# EAGLE board LilyPad_Rainbow LED-Panel (EAGLE 6.1)
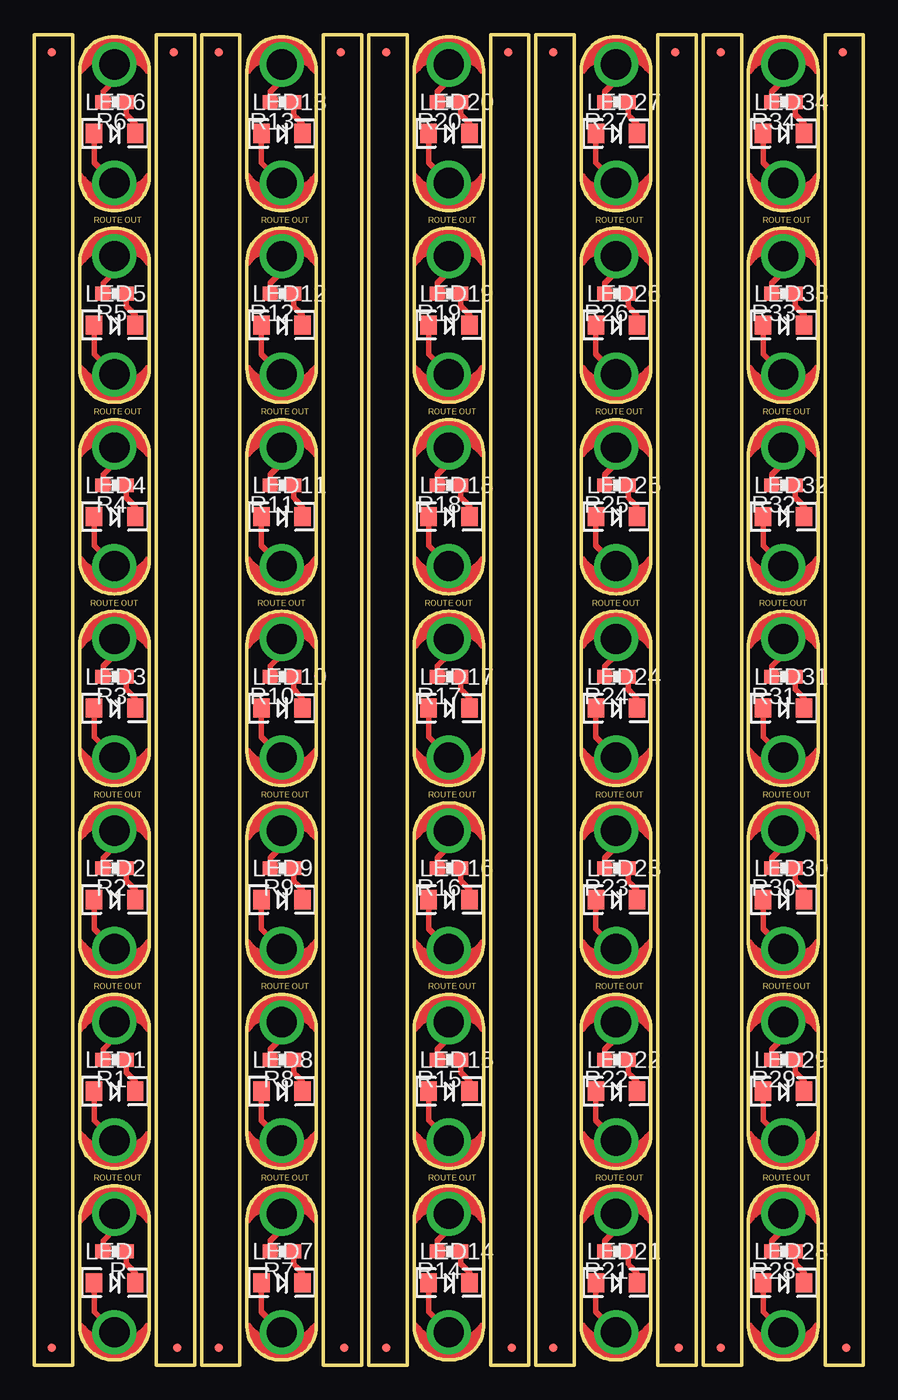
[diagram p0: board, top side]
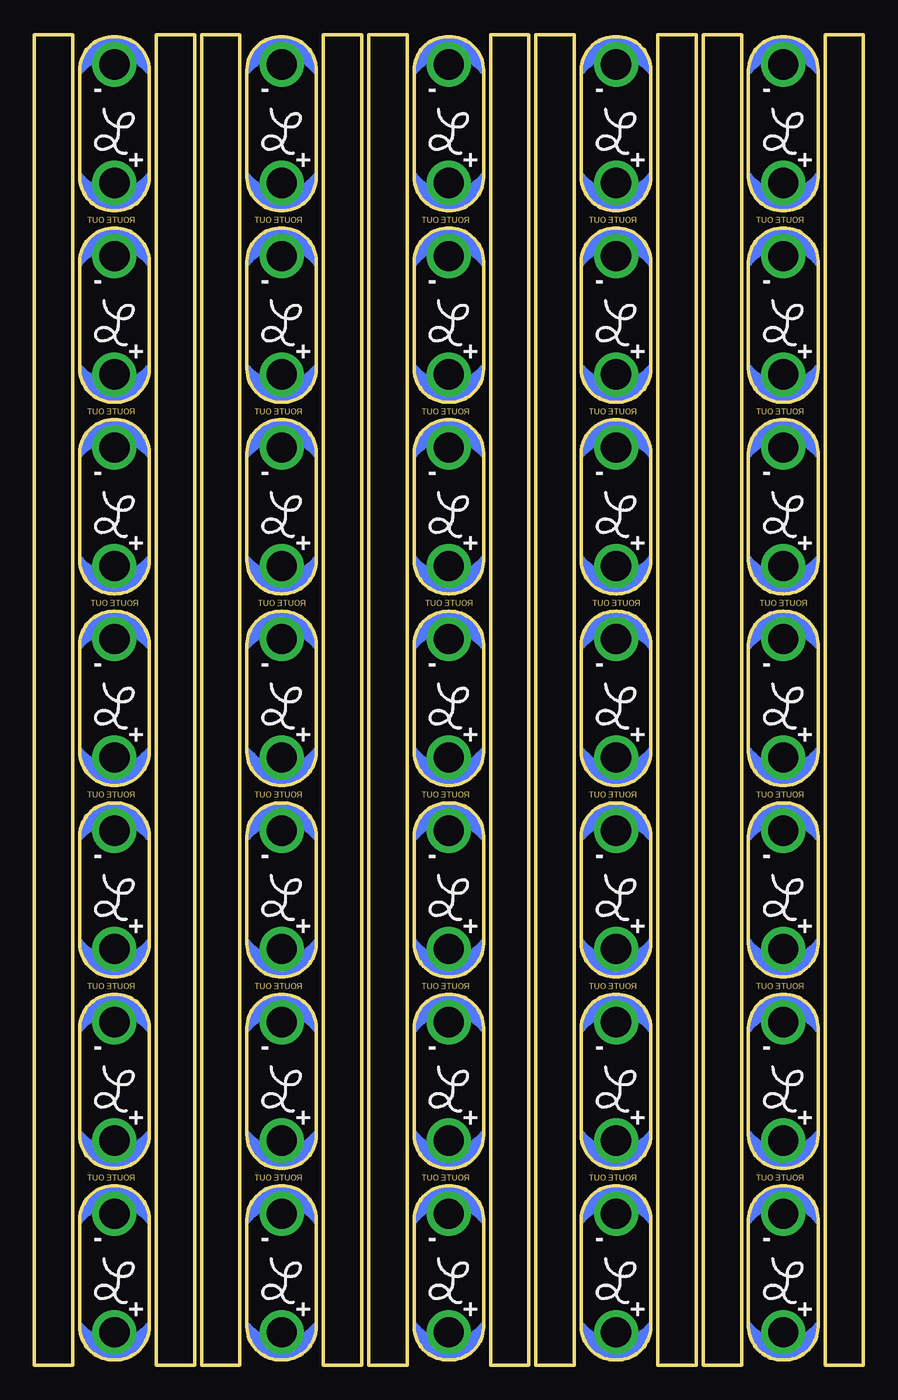
[diagram p1: board, bottom side, seen from below]

Size 60.45 x 97.03 mm. Coordinates in mm from the lower left corner, seen from the top.
Outline: 5.84,0.38 arc-90 3.3,2.79 3.3,10.67 arc-90 5.84,13.08 arc-90 8.38,10.67 8.38,2.79 arc-90 5.84,0.38
Outline: 5.84,14.35 arc-90 3.3,16.76 3.3,24.64 arc-90 5.84,27.05 arc-90 8.38,24.64 8.38,16.76 arc-90 5.84,14.35
Outline: 5.84,28.32 arc-90 3.3,30.73 3.3,38.61 arc-90 5.84,41.02 arc-90 8.38,38.61 8.38,30.73 arc-90 5.84,28.32
Outline: 5.84,42.29 arc-90 3.3,44.7 3.3,52.58 arc-90 5.84,54.99 arc-90 8.38,52.58 8.38,44.7 arc-90 5.84,42.29
Outline: 5.84,56.26 arc-90 3.3,58.67 3.3,66.55 arc-90 5.84,68.96 arc-90 8.38,66.55 8.38,58.67 arc-90 5.84,56.26
Outline: 5.84,70.23 arc-90 3.3,72.64 3.3,80.52 arc-90 5.84,82.93 arc-90 8.38,80.52 8.38,72.64 arc-90 5.84,70.23
Outline: 5.84,84.2 arc-90 3.3,86.61 3.3,94.49 arc-90 5.84,96.9 arc-90 8.38,94.49 8.38,86.61 arc-90 5.84,84.2
Outline: 2.79,97.03 2.79,0 0,0 0,97.03 2.79,97.03
Outline: 11.68,97.03 11.68,0 8.89,0 8.89,97.03 11.68,97.03
Outline: 18.03,0.38 arc-90 15.49,2.79 15.49,10.67 arc-90 18.03,13.08 arc-90 20.57,10.67 20.57,2.79 arc-90 18.03,0.38
Outline: 18.03,14.35 arc-90 15.49,16.76 15.49,24.64 arc-90 18.03,27.05 arc-90 20.57,24.64 20.57,16.76 arc-90 18.03,14.35
Outline: 18.03,28.32 arc-90 15.49,30.73 15.49,38.61 arc-90 18.03,41.02 arc-90 20.57,38.61 20.57,30.73 arc-90 18.03,28.32
Outline: 18.03,42.29 arc-90 15.49,44.7 15.49,52.58 arc-90 18.03,54.99 arc-90 20.57,52.58 20.57,44.7 arc-90 18.03,42.29
Outline: 18.03,56.26 arc-90 15.49,58.67 15.49,66.55 arc-90 18.03,68.96 arc-90 20.57,66.55 20.57,58.67 arc-90 18.03,56.26
Outline: 18.03,70.23 arc-90 15.49,72.64 15.49,80.52 arc-90 18.03,82.93 arc-90 20.57,80.52 20.57,72.64 arc-90 18.03,70.23
Outline: 18.03,84.2 arc-90 15.49,86.61 15.49,94.49 arc-90 18.03,96.9 arc-90 20.57,94.49 20.57,86.61 arc-90 18.03,84.2
Outline: 14.99,97.03 14.99,0 12.19,0 12.19,97.03 14.99,97.03
Outline: 23.88,97.03 23.88,0 21.08,0 21.08,97.03 23.88,97.03
Outline: 30.23,0.38 arc-90 27.69,2.79 27.69,10.67 arc-90 30.23,13.08 arc-90 32.77,10.67 32.77,2.79 arc-90 30.23,0.38
Outline: 30.23,14.35 arc-90 27.69,16.76 27.69,24.64 arc-90 30.23,27.05 arc-90 32.77,24.64 32.77,16.76 arc-90 30.23,14.35
Outline: 30.23,28.32 arc-90 27.69,30.73 27.69,38.61 arc-90 30.23,41.02 arc-90 32.77,38.61 32.77,30.73 arc-90 30.23,28.32
Outline: 30.23,42.29 arc-90 27.69,44.7 27.69,52.58 arc-90 30.23,54.99 arc-90 32.77,52.58 32.77,44.7 arc-90 30.23,42.29
Outline: 30.23,56.26 arc-90 27.69,58.67 27.69,66.55 arc-90 30.23,68.96 arc-90 32.77,66.55 32.77,58.67 arc-90 30.23,56.26
Outline: 30.23,70.23 arc-90 27.69,72.64 27.69,80.52 arc-90 30.23,82.93 arc-90 32.77,80.52 32.77,72.64 arc-90 30.23,70.23
Outline: 30.23,84.2 arc-90 27.69,86.61 27.69,94.49 arc-90 30.23,96.9 arc-90 32.77,94.49 32.77,86.61 arc-90 30.23,84.2
Outline: 27.18,97.03 27.18,0 24.38,0 24.38,97.03 27.18,97.03
Outline: 36.07,97.03 36.07,0 33.27,0 33.27,97.03 36.07,97.03
Outline: 42.42,0.38 arc-90 39.88,2.79 39.88,10.67 arc-90 42.42,13.08 arc-90 44.96,10.67 44.96,2.79 arc-90 42.42,0.38
Outline: 42.42,14.35 arc-90 39.88,16.76 39.88,24.64 arc-90 42.42,27.05 arc-90 44.96,24.64 44.96,16.76 arc-90 42.42,14.35
Outline: 42.42,28.32 arc-90 39.88,30.73 39.88,38.61 arc-90 42.42,41.02 arc-90 44.96,38.61 44.96,30.73 arc-90 42.42,28.32
Outline: 42.42,42.29 arc-90 39.88,44.7 39.88,52.58 arc-90 42.42,54.99 arc-90 44.96,52.58 44.96,44.7 arc-90 42.42,42.29
Outline: 42.42,56.26 arc-90 39.88,58.67 39.88,66.55 arc-90 42.42,68.96 arc-90 44.96,66.55 44.96,58.67 arc-90 42.42,56.26
Outline: 42.42,70.23 arc-90 39.88,72.64 39.88,80.52 arc-90 42.42,82.93 arc-90 44.96,80.52 44.96,72.64 arc-90 42.42,70.23
Outline: 42.42,84.2 arc-90 39.88,86.61 39.88,94.49 arc-90 42.42,96.9 arc-90 44.96,94.49 44.96,86.61 arc-90 42.42,84.2
Outline: 39.37,97.03 39.37,0 36.58,0 36.58,97.03 39.37,97.03
Outline: 48.26,97.03 48.26,0 45.47,0 45.47,97.03 48.26,97.03
Outline: 54.61,0.38 arc-90 52.07,2.79 52.07,10.67 arc-90 54.61,13.08 arc-90 57.15,10.67 57.15,2.79 arc-90 54.61,0.38
Outline: 54.61,14.35 arc-90 52.07,16.76 52.07,24.64 arc-90 54.61,27.05 arc-90 57.15,24.64 57.15,16.76 arc-90 54.61,14.35
Outline: 54.61,28.32 arc-90 52.07,30.73 52.07,38.61 arc-90 54.61,41.02 arc-90 57.15,38.61 57.15,30.73 arc-90 54.61,28.32
Outline: 54.61,42.29 arc-90 52.07,44.7 52.07,52.58 arc-90 54.61,54.99 arc-90 57.15,52.58 57.15,44.7 arc-90 54.61,42.29
Outline: 54.61,56.26 arc-90 52.07,58.67 52.07,66.55 arc-90 54.61,68.96 arc-90 57.15,66.55 57.15,58.67 arc-90 54.61,56.26
Outline: 54.61,70.23 arc-90 52.07,72.64 52.07,80.52 arc-90 54.61,82.93 arc-90 57.15,80.52 57.15,72.64 arc-90 54.61,70.23
Outline: 54.61,84.2 arc-90 52.07,86.61 52.07,94.49 arc-90 54.61,96.9 arc-90 57.15,94.49 57.15,86.61 arc-90 54.61,84.2
Outline: 51.56,97.03 51.56,0 48.77,0 48.77,97.03 51.56,97.03
Outline: 60.45,97.03 60.45,0 57.66,0 57.66,97.03 60.45,97.03
Copper layers (1*16): Top 0.035mm / dielectric 1.5mm / Bottom 0.035mm
Design rules: minimum track width 8mil, minimum drill 20mil, track to track 8mil, track to pad 8mil, pad to pad 8mil, via to via 8mil, smd to smd 8mil, copper to edge 8mil, drill to drill 8mil, minimum pad ring 12mil, minimum via ring 10mil, stop-mask expansion 4mil, vias tented up to drill 20mil, thermal gap 10mil

## Footprints (pad centres in the part's own frame; a part is rotated, then mirrored left to right if it is on the bottom)
MICRO-FIDUCIAL = smd 0.635 x 0.635: 1 0,0
LED-1206 = smd 1.2 x 1.4: A -1.5,0; C 1.5,0
PETAL-SMALL = drill 2.2: 1 0,0
0603-RES = smd 1.1 x 1: 1 -0.85,0; 2 0.85,0

## Placement (x,y rotation side)
E$1  [MICRO-FIDUCIAL]  1.27,95.76 0 top
E$2  [MICRO-FIDUCIAL]  10.16,95.76 0 top
E$3  [MICRO-FIDUCIAL]  1.27,1.27 0 top
E$4  [MICRO-FIDUCIAL]  10.41,1.27 0 top
E$5  [MICRO-FIDUCIAL]  13.46,95.76 0 top
E$6  [MICRO-FIDUCIAL]  22.35,95.76 0 top
E$7  [MICRO-FIDUCIAL]  13.46,1.27 0 top
E$8  [MICRO-FIDUCIAL]  22.61,1.27 0 top
E$9  [MICRO-FIDUCIAL]  25.65,95.76 0 top
E$10  [MICRO-FIDUCIAL]  34.54,95.76 0 top
E$11  [MICRO-FIDUCIAL]  25.65,1.27 0 top
E$12  [MICRO-FIDUCIAL]  34.8,1.27 0 top
E$13  [MICRO-FIDUCIAL]  37.85,95.76 0 top
E$14  [MICRO-FIDUCIAL]  46.74,95.76 0 top
E$15  [MICRO-FIDUCIAL]  37.85,1.27 0 top
E$16  [MICRO-FIDUCIAL]  46.99,1.27 0 top
E$17  [MICRO-FIDUCIAL]  50.04,95.76 0 top
E$18  [MICRO-FIDUCIAL]  58.93,95.76 0 top
E$19  [MICRO-FIDUCIAL]  50.04,1.27 0 top
E$20  [MICRO-FIDUCIAL]  59.18,1.27 0 top
LED  White  [LED-1206]  5.86,6.02 0 top
LED1  White  [LED-1206]  5.86,19.99 0 top
LED2  White  [LED-1206]  5.86,33.96 0 top
LED3  White  [LED-1206]  5.86,47.93 0 top
LED4  White  [LED-1206]  5.86,61.9 0 top
LED5  White  [LED-1206]  5.86,75.87 0 top
LED6  White  [LED-1206]  5.86,89.84 0 top
LED7  White  [LED-1206]  18.05,6.02 0 top
LED8  White  [LED-1206]  18.05,19.99 0 top
LED9  White  [LED-1206]  18.05,33.96 0 top
LED10  White  [LED-1206]  18.05,47.93 0 top
LED11  White  [LED-1206]  18.05,61.9 0 top
LED12  White  [LED-1206]  18.05,75.87 0 top
LED13  White  [LED-1206]  18.05,89.84 0 top
LED14  White  [LED-1206]  30.25,6.02 0 top
LED15  White  [LED-1206]  30.25,19.99 0 top
LED16  White  [LED-1206]  30.25,33.96 0 top
LED17  White  [LED-1206]  30.25,47.93 0 top
LED18  White  [LED-1206]  30.25,61.9 0 top
LED19  White  [LED-1206]  30.25,75.87 0 top
LED20  White  [LED-1206]  30.25,89.84 0 top
LED21  White  [LED-1206]  42.44,6.02 0 top
LED22  White  [LED-1206]  42.44,19.99 0 top
LED23  White  [LED-1206]  42.44,33.96 0 top
LED24  White  [LED-1206]  42.44,47.93 0 top
LED25  White  [LED-1206]  42.44,61.9 0 top
LED26  White  [LED-1206]  42.44,75.87 0 top
LED27  White  [LED-1206]  42.44,89.84 0 top
LED28  White  [LED-1206]  54.63,6.02 0 top
LED29  White  [LED-1206]  54.63,19.99 0 top
LED30  White  [LED-1206]  54.63,33.96 0 top
LED31  White  [LED-1206]  54.63,47.93 0 top
LED32  White  [LED-1206]  54.63,61.9 0 top
LED33  White  [LED-1206]  54.63,75.87 0 top
LED34  White  [LED-1206]  54.63,89.84 0 top
LED+  SEWTAP6  [PETAL-SMALL]  5.84,2.41 0 top
LED+1  SEWTAP6  [PETAL-SMALL]  5.84,16.38 0 top
LED+2  SEWTAP6  [PETAL-SMALL]  5.84,30.35 0 top
LED+3  SEWTAP6  [PETAL-SMALL]  5.84,44.32 0 top
LED+4  SEWTAP6  [PETAL-SMALL]  5.84,58.29 0 top
LED+5  SEWTAP6  [PETAL-SMALL]  5.84,72.26 0 top
LED+6  SEWTAP6  [PETAL-SMALL]  5.84,86.23 0 top
LED+7  SEWTAP6  [PETAL-SMALL]  18.03,2.41 0 top
LED+8  SEWTAP6  [PETAL-SMALL]  18.03,16.38 0 top
LED+9  SEWTAP6  [PETAL-SMALL]  18.03,30.35 0 top
LED+10  SEWTAP6  [PETAL-SMALL]  18.03,44.32 0 top
LED+11  SEWTAP6  [PETAL-SMALL]  18.03,58.29 0 top
LED+12  SEWTAP6  [PETAL-SMALL]  18.03,72.26 0 top
LED+13  SEWTAP6  [PETAL-SMALL]  18.03,86.23 0 top
LED+14  SEWTAP6  [PETAL-SMALL]  30.23,2.41 0 top
LED+15  SEWTAP6  [PETAL-SMALL]  30.23,16.38 0 top
LED+16  SEWTAP6  [PETAL-SMALL]  30.23,30.35 0 top
LED+17  SEWTAP6  [PETAL-SMALL]  30.23,44.32 0 top
LED+18  SEWTAP6  [PETAL-SMALL]  30.23,58.29 0 top
LED+19  SEWTAP6  [PETAL-SMALL]  30.23,72.26 0 top
LED+20  SEWTAP6  [PETAL-SMALL]  30.23,86.23 0 top
LED+21  SEWTAP6  [PETAL-SMALL]  42.42,2.41 0 top
LED+22  SEWTAP6  [PETAL-SMALL]  42.42,16.38 0 top
LED+23  SEWTAP6  [PETAL-SMALL]  42.42,30.35 0 top
LED+24  SEWTAP6  [PETAL-SMALL]  42.42,44.32 0 top
LED+25  SEWTAP6  [PETAL-SMALL]  42.42,58.29 0 top
LED+26  SEWTAP6  [PETAL-SMALL]  42.42,72.26 0 top
LED+27  SEWTAP6  [PETAL-SMALL]  42.42,86.23 0 top
LED+28  SEWTAP6  [PETAL-SMALL]  54.61,2.41 0 top
LED+29  SEWTAP6  [PETAL-SMALL]  54.61,16.38 0 top
LED+30  SEWTAP6  [PETAL-SMALL]  54.61,30.35 0 top
LED+31  SEWTAP6  [PETAL-SMALL]  54.61,44.32 0 top
LED+32  SEWTAP6  [PETAL-SMALL]  54.61,58.29 0 top
LED+33  SEWTAP6  [PETAL-SMALL]  54.61,72.26 0 top
LED+34  SEWTAP6  [PETAL-SMALL]  54.61,86.23 0 top
LED-  SEWTAP6  [PETAL-SMALL]  5.84,11.05 180 top
LED-1  SEWTAP6  [PETAL-SMALL]  5.84,25.02 180 top
LED-2  SEWTAP6  [PETAL-SMALL]  5.84,38.99 180 top
LED-3  SEWTAP6  [PETAL-SMALL]  5.84,52.96 180 top
LED-4  SEWTAP6  [PETAL-SMALL]  5.84,66.93 180 top
LED-5  SEWTAP6  [PETAL-SMALL]  5.84,80.9 180 top
LED-6  SEWTAP6  [PETAL-SMALL]  5.84,94.87 180 top
LED-7  SEWTAP6  [PETAL-SMALL]  18.03,11.05 180 top
LED-8  SEWTAP6  [PETAL-SMALL]  18.03,25.02 180 top
LED-9  SEWTAP6  [PETAL-SMALL]  18.03,38.99 180 top
LED-10  SEWTAP6  [PETAL-SMALL]  18.03,52.96 180 top
LED-11  SEWTAP6  [PETAL-SMALL]  18.03,66.93 180 top
LED-12  SEWTAP6  [PETAL-SMALL]  18.03,80.9 180 top
LED-13  SEWTAP6  [PETAL-SMALL]  18.03,94.87 180 top
LED-14  SEWTAP6  [PETAL-SMALL]  30.23,11.05 180 top
LED-15  SEWTAP6  [PETAL-SMALL]  30.23,25.02 180 top
LED-16  SEWTAP6  [PETAL-SMALL]  30.23,38.99 180 top
LED-17  SEWTAP6  [PETAL-SMALL]  30.23,52.96 180 top
LED-18  SEWTAP6  [PETAL-SMALL]  30.23,66.93 180 top
LED-19  SEWTAP6  [PETAL-SMALL]  30.23,80.9 180 top
LED-20  SEWTAP6  [PETAL-SMALL]  30.23,94.87 180 top
LED-21  SEWTAP6  [PETAL-SMALL]  42.42,11.05 180 top
LED-22  SEWTAP6  [PETAL-SMALL]  42.42,25.02 180 top
LED-23  SEWTAP6  [PETAL-SMALL]  42.42,38.99 180 top
LED-24  SEWTAP6  [PETAL-SMALL]  42.42,52.96 180 top
LED-25  SEWTAP6  [PETAL-SMALL]  42.42,66.93 180 top
LED-26  SEWTAP6  [PETAL-SMALL]  42.42,80.9 180 top
LED-27  SEWTAP6  [PETAL-SMALL]  42.42,94.87 180 top
LED-28  SEWTAP6  [PETAL-SMALL]  54.61,11.05 180 top
LED-29  SEWTAP6  [PETAL-SMALL]  54.61,25.02 180 top
LED-30  SEWTAP6  [PETAL-SMALL]  54.61,38.99 180 top
LED-31  SEWTAP6  [PETAL-SMALL]  54.61,52.96 180 top
LED-32  SEWTAP6  [PETAL-SMALL]  54.61,66.93 180 top
LED-33  SEWTAP6  [PETAL-SMALL]  54.61,80.9 180 top
LED-34  SEWTAP6  [PETAL-SMALL]  54.61,94.87 180 top
LOGO1  LOGO-LPL  [LOGO-L]  5.84,6.17 0 bottom
LOGO2  LOGO-LPL  [LOGO-L]  5.84,20.14 0 bottom
LOGO3  LOGO-LPL  [LOGO-L]  5.84,34.11 0 bottom
LOGO4  LOGO-LPL  [LOGO-L]  5.84,48.08 0 bottom
LOGO5  LOGO-LPL  [LOGO-L]  5.84,62.05 0 bottom
LOGO6  LOGO-LPL  [LOGO-L]  5.84,76.02 0 bottom
LOGO7  LOGO-LPL  [LOGO-L]  5.84,89.99 0 bottom
LOGO8  LOGO-LPL  [LOGO-L]  18.03,6.17 0 bottom
LOGO9  LOGO-LPL  [LOGO-L]  18.03,20.14 0 bottom
LOGO10  LOGO-LPL  [LOGO-L]  18.03,34.11 0 bottom
LOGO11  LOGO-LPL  [LOGO-L]  18.03,48.08 0 bottom
LOGO12  LOGO-LPL  [LOGO-L]  18.03,62.05 0 bottom
LOGO13  LOGO-LPL  [LOGO-L]  18.03,76.02 0 bottom
LOGO14  LOGO-LPL  [LOGO-L]  18.03,89.99 0 bottom
LOGO15  LOGO-LPL  [LOGO-L]  30.23,6.17 0 bottom
LOGO16  LOGO-LPL  [LOGO-L]  30.23,20.14 0 bottom
LOGO17  LOGO-LPL  [LOGO-L]  30.23,34.11 0 bottom
LOGO18  LOGO-LPL  [LOGO-L]  30.23,48.08 0 bottom
LOGO19  LOGO-LPL  [LOGO-L]  30.23,62.05 0 bottom
LOGO20  LOGO-LPL  [LOGO-L]  30.23,76.02 0 bottom
LOGO21  LOGO-LPL  [LOGO-L]  30.23,89.99 0 bottom
LOGO22  LOGO-LPL  [LOGO-L]  42.42,6.17 0 bottom
LOGO23  LOGO-LPL  [LOGO-L]  42.42,20.14 0 bottom
LOGO24  LOGO-LPL  [LOGO-L]  42.42,34.11 0 bottom
LOGO25  LOGO-LPL  [LOGO-L]  42.42,48.08 0 bottom
LOGO26  LOGO-LPL  [LOGO-L]  42.42,62.05 0 bottom
LOGO27  LOGO-LPL  [LOGO-L]  42.42,76.02 0 bottom
LOGO28  LOGO-LPL  [LOGO-L]  42.42,89.99 0 bottom
LOGO29  LOGO-LPL  [LOGO-L]  54.61,6.17 0 bottom
LOGO30  LOGO-LPL  [LOGO-L]  54.61,20.14 0 bottom
LOGO31  LOGO-LPL  [LOGO-L]  54.61,34.11 0 bottom
LOGO32  LOGO-LPL  [LOGO-L]  54.61,48.08 0 bottom
LOGO33  LOGO-LPL  [LOGO-L]  54.61,62.05 0 bottom
LOGO34  LOGO-LPL  [LOGO-L]  54.61,76.02 0 bottom
LOGO35  LOGO-LPL  [LOGO-L]  54.61,89.99 0 bottom
R  100  [0603-RES]  5.86,8.3 180 top
R1  100  [0603-RES]  5.86,22.27 180 top
R2  100  [0603-RES]  5.86,36.25 180 top
R3  100  [0603-RES]  5.86,50.22 180 top
R4  100  [0603-RES]  5.86,64.19 180 top
R5  100  [0603-RES]  5.86,78.16 180 top
R6  100  [0603-RES]  5.86,92.12 180 top
R7  100  [0603-RES]  18.05,8.3 180 top
R8  100  [0603-RES]  18.05,22.27 180 top
R9  100  [0603-RES]  18.05,36.25 180 top
R10  100  [0603-RES]  18.05,50.22 180 top
R11  100  [0603-RES]  18.05,64.19 180 top
R12  100  [0603-RES]  18.05,78.16 180 top
R13  100  [0603-RES]  18.05,92.12 180 top
R14  100  [0603-RES]  30.25,8.3 180 top
R15  100  [0603-RES]  30.25,22.27 180 top
R16  100  [0603-RES]  30.25,36.25 180 top
R17  100  [0603-RES]  30.25,50.22 180 top
R18  100  [0603-RES]  30.25,64.19 180 top
R19  100  [0603-RES]  30.25,78.16 180 top
R20  100  [0603-RES]  30.25,92.12 180 top
R21  100  [0603-RES]  42.44,8.3 180 top
R22  100  [0603-RES]  42.44,22.27 180 top
R23  100  [0603-RES]  42.44,36.25 180 top
R24  100  [0603-RES]  42.44,50.22 180 top
R25  100  [0603-RES]  42.44,64.19 180 top
R26  100  [0603-RES]  42.44,78.16 180 top
R27  100  [0603-RES]  42.44,92.12 180 top
R28  100  [0603-RES]  54.63,8.3 180 top
R29  100  [0603-RES]  54.63,22.27 180 top
R30  100  [0603-RES]  54.63,36.25 180 top
R31  100  [0603-RES]  54.63,50.22 180 top
R32  100  [0603-RES]  54.63,64.19 180 top
R33  100  [0603-RES]  54.63,78.16 180 top
R34  100  [0603-RES]  54.63,92.12 180 top

## Library data of the parts
E$1-E$20 = SparkFun-Aesthetics
LED LED1-LED34 = SparkFun-3-2-07
LED+ LED+1-LED+34 LED- LED-1-LED-34 LOGO1-LOGO35 = LilyPad-Wearables
R R1-R34 = SparkFun

## Nets
+: LED+.1 LED.A
+1: LED1.A LED+1.1
+2: LED2.A LED+2.1
+3: LED3.A LED+3.1
+4: LED4.A LED+4.1
+5: LED5.A LED+5.1
+6: LED6.A LED+6.1
+7: LED7.A LED+7.1
+8: LED8.A LED+8.1
+9: LED9.A LED+9.1
+10: LED10.A LED+10.1
+11: LED11.A LED+11.1
+12: LED12.A LED+12.1
+13: LED13.A LED+13.1
+14: LED14.A LED+14.1
+15: LED15.A LED+15.1
+16: LED16.A LED+16.1
+17: LED17.A LED+17.1
+18: LED18.A LED+18.1
+19: LED19.A LED+19.1
+20: LED20.A LED+20.1
+21: LED21.A LED+21.1
+22: LED22.A LED+22.1
+23: LED23.A LED+23.1
+24: LED24.A LED+24.1
+25: LED25.A LED+25.1
+26: LED26.A LED+26.1
+27: LED27.A LED+27.1
+28: LED28.A LED+28.1
+29: LED29.A LED+29.1
+30: LED30.A LED+30.1
+31: LED31.A LED+31.1
+32: LED32.A LED+32.1
+33: LED33.A LED+33.1
+34: LED34.A LED+34.1
-: LED-.1 R.2
-1: LED-1.1 R1.2
-2: LED-2.1 R2.2
-3: LED-3.1 R3.2
-4: LED-4.1 R4.2
-5: LED-5.1 R5.2
-6: LED-6.1 R6.2
-7: LED-7.1 R7.2
-8: LED-8.1 R8.2
-9: LED-9.1 R9.2
-10: LED-10.1 R10.2
-11: LED-11.1 R11.2
-12: LED-12.1 R12.2
-13: LED-13.1 R13.2
-14: LED-14.1 R14.2
-15: LED-15.1 R15.2
-16: LED-16.1 R16.2
-17: LED-17.1 R17.2
-18: LED-18.1 R18.2
-19: LED-19.1 R19.2
-20: LED-20.1 R20.2
-21: LED-21.1 R21.2
-22: LED-22.1 R22.2
-23: LED-23.1 R23.2
-24: LED-24.1 R24.2
-25: LED-25.1 R25.2
-26: LED-26.1 R26.2
-27: LED-27.1 R27.2
-28: LED-28.1 R28.2
-29: LED-29.1 R29.2
-30: LED-30.1 R30.2
-31: LED-31.1 R31.2
-32: LED-32.1 R32.2
-33: LED-33.1 R33.2
-34: LED-34.1 R34.2
N$1: LED.C R.1
N$2: LED1.C R1.1
N$3: LED2.C R2.1
N$4: LED3.C R3.1
N$5: LED4.C R4.1
N$6: LED5.C R5.1
N$7: LED6.C R6.1
N$8: LED7.C R7.1
N$9: LED8.C R8.1
N$10: LED9.C R9.1
N$11: LED10.C R10.1
N$12: LED11.C R11.1
N$13: LED12.C R12.1
N$14: LED13.C R13.1
N$15: LED14.C R14.1
N$16: LED15.C R15.1
N$17: LED16.C R16.1
N$18: LED17.C R17.1
N$19: LED18.C R18.1
N$20: LED19.C R19.1
N$21: LED20.C R20.1
N$22: LED21.C R21.1
N$23: LED22.C R22.1
N$24: LED23.C R23.1
N$25: LED24.C R24.1
N$26: LED25.C R25.1
N$27: LED26.C R26.1
N$28: LED27.C R27.1
N$29: LED28.C R28.1
N$30: LED29.C R29.1
N$31: LED30.C R30.1
N$32: LED31.C R31.1
N$33: LED32.C R32.1
N$34: LED33.C R33.1
N$35: LED34.C R34.1

## Tracks (layer width: path | path; a pad name or v marks a point on that pad's centre or on a via)
+
  Top 0.406: 5.84,2.29 LED+.1 4.36,3.89 LED.A
+1
  Top 0.406: 5.84,16.26 LED+1.1 4.36,17.86 LED1.A
+2
  Top 0.406: 5.84,30.23 LED+2.1 4.36,31.83 LED2.A
+3
  Top 0.406: 5.84,44.2 LED+3.1 4.36,45.8 LED3.A
+4
  Top 0.406: 5.84,58.17 LED+4.1 4.36,59.77 LED4.A
+5
  Top 0.406: 5.84,72.14 LED+5.1 4.36,73.74 LED5.A
+6
  Top 0.406: 5.84,86.11 LED+6.1 4.36,87.71 LED6.A
+7
  Top 0.406: 18.03,2.29 LED+7.1 16.55,3.89 LED7.A
+8
  Top 0.406: 18.03,16.26 LED+8.1 16.55,17.86 LED8.A
+9
  Top 0.406: 18.03,30.23 LED+9.1 16.55,31.83 LED9.A
+10
  Top 0.406: 18.03,44.2 LED+10.1 16.55,45.8 LED10.A
+11
  Top 0.406: 18.03,58.17 LED+11.1 16.55,59.77 LED11.A
+12
  Top 0.406: 18.03,72.14 LED+12.1 16.55,73.74 LED12.A
+13
  Top 0.406: 18.03,86.11 LED+13.1 16.55,87.71 LED13.A
+14
  Top 0.406: 30.23,2.29 LED+14.1 28.75,3.89 LED14.A
+15
  Top 0.406: 30.23,16.26 LED+15.1 28.75,17.86 LED15.A
+16
  Top 0.406: 30.23,30.23 LED+16.1 28.75,31.83 LED16.A
+17
  Top 0.406: 30.23,44.2 LED+17.1 28.75,45.8 LED17.A
+18
  Top 0.406: 30.23,58.17 LED+18.1 28.75,59.77 LED18.A
+19
  Top 0.406: 30.23,72.14 LED+19.1 28.75,73.74 LED19.A
+20
  Top 0.406: 30.23,86.11 LED+20.1 28.75,87.71 LED20.A
+21
  Top 0.406: 42.42,2.29 LED+21.1 40.94,3.89 LED21.A
+22
  Top 0.406: 42.42,16.26 LED+22.1 40.94,17.86 LED22.A
+23
  Top 0.406: 42.42,30.23 LED+23.1 40.94,31.83 LED23.A
+24
  Top 0.406: 42.42,44.2 LED+24.1 40.94,45.8 LED24.A
+25
  Top 0.406: 42.42,58.17 LED+25.1 40.94,59.77 LED25.A
+26
  Top 0.406: 42.42,72.14 LED+26.1 40.94,73.74 LED26.A
+27
  Top 0.406: 42.42,86.11 LED+27.1 40.94,87.71 LED27.A
+28
  Top 0.406: 54.61,2.29 LED+28.1 53.13,3.89 LED28.A
+29
  Top 0.406: 54.61,16.26 LED+29.1 53.13,17.86 LED29.A
+30
  Top 0.406: 54.61,30.23 LED+30.1 53.13,31.83 LED30.A
+31
  Top 0.406: 54.61,44.2 LED+31.1 53.13,45.8 LED31.A
+32
  Top 0.406: 54.61,58.17 LED+32.1 53.13,59.77 LED32.A
+33
  Top 0.406: 54.61,72.14 LED+33.1 53.13,73.74 LED33.A
+34
  Top 0.406: 54.61,86.11 LED+34.1 53.13,87.71 LED34.A
-
  Top 0.406: LED-.1 5.84,9.91 5.01,9.08 R.2
-1
  Top 0.406: LED-1.1 5.84,23.88 5.01,23.05 R1.2
-2
  Top 0.406: LED-2.1 5.84,37.85 5.01,37.02 R2.2
-3
  Top 0.406: LED-3.1 5.84,51.82 5.01,50.99 R3.2
-4
  Top 0.406: LED-4.1 5.84,65.79 5.01,64.96 R4.2
-5
  Top 0.406: LED-5.1 5.84,79.76 5.01,78.93 R5.2
-6
  Top 0.406: LED-6.1 5.84,93.73 5.01,92.9 R6.2
-7
  Top 0.406: LED-7.1 18.03,9.91 17.2,9.08 R7.2
-8
  Top 0.406: LED-8.1 18.03,23.88 17.2,23.05 R8.2
-9
  Top 0.406: LED-9.1 18.03,37.85 17.2,37.02 R9.2
-10
  Top 0.406: LED-10.1 18.03,51.82 17.2,50.99 R10.2
-11
  Top 0.406: LED-11.1 18.03,65.79 17.2,64.96 R11.2
-12
  Top 0.406: LED-12.1 18.03,79.76 17.2,78.93 R12.2
-13
  Top 0.406: LED-13.1 18.03,93.73 17.2,92.9 R13.2
-14
  Top 0.406: LED-14.1 30.23,9.91 29.4,9.08 R14.2
-15
  Top 0.406: LED-15.1 30.23,23.88 29.4,23.05 R15.2
-16
  Top 0.406: LED-16.1 30.23,37.85 29.4,37.02 R16.2
-17
  Top 0.406: LED-17.1 30.23,51.82 29.4,50.99 R17.2
-18
  Top 0.406: LED-18.1 30.23,65.79 29.4,64.96 R18.2
-19
  Top 0.406: LED-19.1 30.23,79.76 29.4,78.93 R19.2
-20
  Top 0.406: LED-20.1 30.23,93.73 29.4,92.9 R20.2
-21
  Top 0.406: LED-21.1 42.42,9.91 41.59,9.08 R21.2
-22
  Top 0.406: LED-22.1 42.42,23.88 41.59,23.05 R22.2
-23
  Top 0.406: LED-23.1 42.42,37.85 41.59,37.02 R23.2
-24
  Top 0.406: LED-24.1 42.42,51.82 41.59,50.99 R24.2
-25
  Top 0.406: LED-25.1 42.42,65.79 41.59,64.96 R25.2
-26
  Top 0.406: LED-26.1 42.42,79.76 41.59,78.93 R26.2
-27
  Top 0.406: LED-27.1 42.42,93.73 41.59,92.9 R27.2
-28
  Top 0.406: LED-28.1 54.61,9.91 53.78,9.08 R28.2
-29
  Top 0.406: LED-29.1 54.61,23.88 53.78,23.05 R29.2
-30
  Top 0.406: LED-30.1 54.61,37.85 53.78,37.02 R30.2
-31
  Top 0.406: LED-31.1 54.61,51.82 53.78,50.99 R31.2
-32
  Top 0.406: LED-32.1 54.61,65.79 53.78,64.96 R32.2
-33
  Top 0.406: LED-33.1 54.61,79.76 53.78,78.93 R33.2
-34
  Top 0.406: LED-34.1 54.61,93.73 53.78,92.9 R34.2
N$1
  Top 0.254: 6.92,7.17 6.86,7.24
  Top 0.406: LED.C 7.36,6.74 6.92,7.17 6.71,7.38 R.1
N$2
  Top 0.254: 6.92,21.15 6.86,21.21
  Top 0.406: LED1.C 7.36,20.7 6.92,21.15 6.71,21.36 R1.1
N$3
  Top 0.254: 6.92,35.12 6.86,35.18
  Top 0.406: LED2.C 7.36,34.67 6.92,35.12 6.71,35.33 R2.1
N$4
  Top 0.254: 6.92,49.08 6.86,49.15
  Top 0.406: LED3.C 7.36,48.64 6.92,49.08 6.71,49.3 R3.1
N$5
  Top 0.254: 6.92,63.06 6.86,63.12
  Top 0.406: LED4.C 7.36,62.61 6.92,63.06 6.71,63.27 R4.1
N$6
  Top 0.254: 6.92,77.03 6.86,77.09
  Top 0.406: LED5.C 7.36,76.59 6.92,77.03 6.71,77.23 R5.1
N$7
  Top 0.254: 6.92,91 6.86,91.06
  Top 0.406: LED6.C 7.36,90.56 6.92,91 6.71,91.2 R6.1
N$8
  Top 0.254: 19.11,7.17 19.05,7.24
  Top 0.406: LED7.C 19.55,6.74 19.11,7.17 18.9,7.38 R7.1
N$9
  Top 0.254: 19.11,21.15 19.05,21.21
  Top 0.406: LED8.C 19.55,20.7 19.11,21.15 18.9,21.36 R8.1
N$10
  Top 0.254: 19.11,35.12 19.05,35.18
  Top 0.406: LED9.C 19.55,34.67 19.11,35.12 18.9,35.33 R9.1
N$11
  Top 0.254: 19.11,49.08 19.05,49.15
  Top 0.406: LED10.C 19.55,48.64 19.11,49.08 18.9,49.3 R10.1
N$12
  Top 0.254: 19.11,63.06 19.05,63.12
  Top 0.406: LED11.C 19.55,62.61 19.11,63.06 18.9,63.27 R11.1
N$13
  Top 0.254: 19.11,77.03 19.05,77.09
  Top 0.406: LED12.C 19.55,76.59 19.11,77.03 18.9,77.23 R12.1
N$14
  Top 0.254: 19.11,91 19.05,91.06
  Top 0.406: LED13.C 19.55,90.56 19.11,91 18.9,91.2 R13.1
N$15
  Top 0.254: 31.3,7.17 31.24,7.24
  Top 0.406: LED14.C 31.75,6.74 31.3,7.17 31.1,7.38 R14.1
N$16
  Top 0.254: 31.3,21.15 31.24,21.21
  Top 0.406: LED15.C 31.75,20.7 31.3,21.15 31.1,21.36 R15.1
N$17
  Top 0.254: 31.3,35.12 31.24,35.18
  Top 0.406: LED16.C 31.75,34.67 31.3,35.12 31.1,35.33 R16.1
N$18
  Top 0.254: 31.3,49.08 31.24,49.15
  Top 0.406: LED17.C 31.75,48.64 31.3,49.08 31.1,49.3 R17.1
N$19
  Top 0.254: 31.3,63.06 31.24,63.12
  Top 0.406: LED18.C 31.75,62.61 31.3,63.06 31.1,63.27 R18.1
N$20
  Top 0.254: 31.3,77.03 31.24,77.09
  Top 0.406: LED19.C 31.75,76.59 31.3,77.03 31.1,77.23 R19.1
N$21
  Top 0.254: 31.3,91 31.24,91.06
  Top 0.406: LED20.C 31.75,90.56 31.3,91 31.1,91.2 R20.1
N$22
  Top 0.254: 43.5,7.17 43.43,7.24
  Top 0.406: LED21.C 43.94,6.74 43.5,7.17 43.29,7.38 R21.1
N$23
  Top 0.254: 43.5,21.15 43.43,21.21
  Top 0.406: LED22.C 43.94,20.7 43.5,21.15 43.29,21.36 R22.1
N$24
  Top 0.254: 43.5,35.12 43.43,35.18
  Top 0.406: LED23.C 43.94,34.67 43.5,35.12 43.29,35.33 R23.1
N$25
  Top 0.254: 43.5,49.08 43.43,49.15
  Top 0.406: LED24.C 43.94,48.64 43.5,49.08 43.29,49.3 R24.1
N$26
  Top 0.254: 43.5,63.06 43.43,63.12
  Top 0.406: LED25.C 43.94,62.61 43.5,63.06 43.29,63.27 R25.1
N$27
  Top 0.254: 43.5,77.03 43.43,77.09
  Top 0.406: LED26.C 43.94,76.59 43.5,77.03 43.29,77.23 R26.1
N$28
  Top 0.254: 43.5,91 43.43,91.06
  Top 0.406: LED27.C 43.94,90.56 43.5,91 43.29,91.2 R27.1
N$29
  Top 0.254: 55.69,7.17 55.63,7.24
  Top 0.406: LED28.C 56.13,6.74 55.69,7.17 55.48,7.38 R28.1
N$30
  Top 0.254: 55.69,21.15 55.63,21.21
  Top 0.406: LED29.C 56.13,20.7 55.69,21.15 55.48,21.36 R29.1
N$31
  Top 0.254: 55.69,35.12 55.63,35.18
  Top 0.406: LED30.C 56.13,34.67 55.69,35.12 55.48,35.33 R30.1
N$32
  Top 0.254: 55.69,49.08 55.63,49.15
  Top 0.406: LED31.C 56.13,48.64 55.69,49.08 55.48,49.3 R31.1
N$33
  Top 0.254: 55.69,63.06 55.63,63.12
  Top 0.406: LED32.C 56.13,62.61 55.69,63.06 55.48,63.27 R32.1
N$34
  Top 0.254: 55.69,77.03 55.63,77.09
  Top 0.406: LED33.C 56.13,76.59 55.69,77.03 55.48,77.23 R33.1
N$35
  Top 0.254: 55.69,91 55.63,91.06
  Top 0.406: LED34.C 56.13,90.56 55.69,91 55.48,91.2 R34.1

## Text on the board
Dimension: ROUTE OUT | ROUTE OUT | ROUTE OUT | ROUTE OUT | ROUTE OUT | ROUTE OUT | ROUTE OUT | ROUTE OUT | ROUTE OUT | ROUTE OUT | ROUTE OUT | ROUTE OUT | ROUTE OUT | ROUTE OUT | ROUTE OUT | ROUTE OUT | ROUTE OUT | ROUTE OUT | ROUTE OUT | ROUTE OUT | ROUTE OUT | ROUTE OUT | ROUTE OUT | ROUTE OUT | ROUTE OUT | ROUTE OUT | ROUTE OUT | ROUTE OUT | ROUTE OUT | ROUTE OUT
bPlace: - | - | - | - | - | + | + | + | + | + | - | - | - | - | - | + | + | + | + | + | - | - | - | - | - | + | + | + | + | + | - | - | - | - | - | + | + | + | + | + | - | - | - | - | - | + | + | + | + | + | - | - | - | - | - | + | + | + | + | + | - | - | - | - | - | + | + | + | + | +